# Altium PCB Apollo_Main_Board_1 8.PcbDoc (part 3 of 4)
Units mil, origin at the board's own origin, x right, y up, seen from the top; angles counter-clockwise.
Board outline 984.25 x 629.92 mil, 6 copper layers (Top, Inner Layer 2, Inner Layer 3, Inner Layer 4, Inner Layer 5, Bottom), stack 5.16 mil thick; 125 components, 112 nets, 514 pads, 2007 vias.
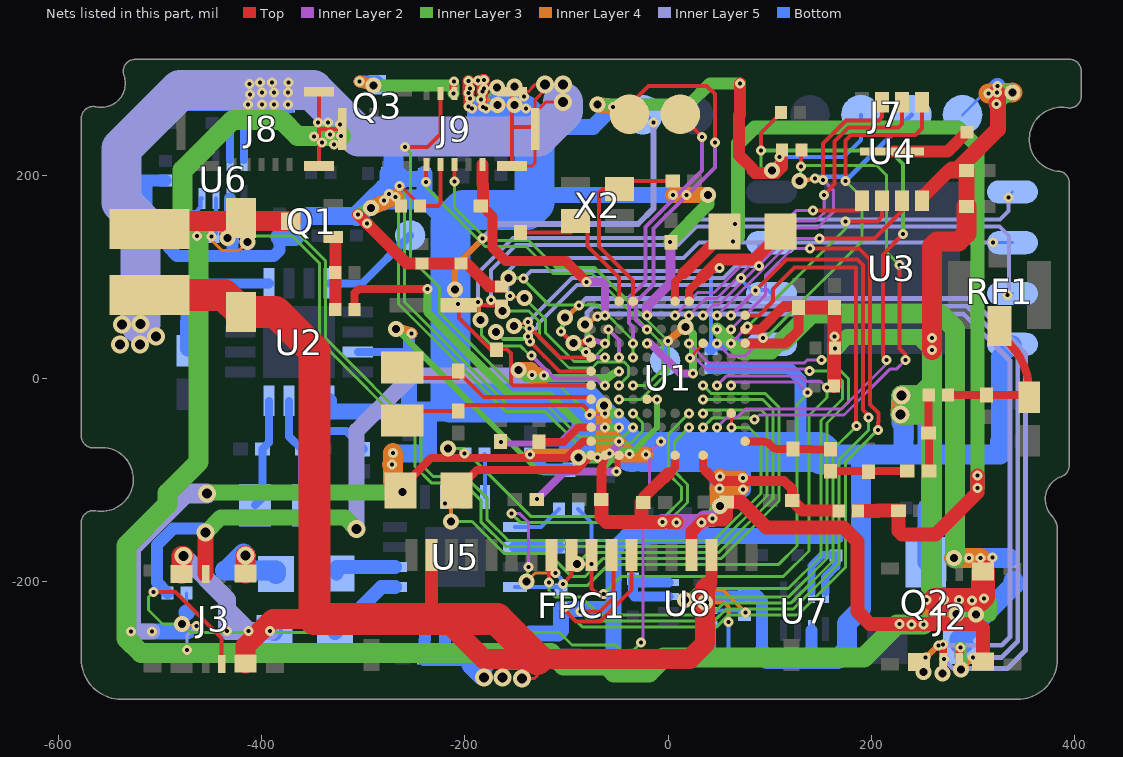
[diagram p7: the nets of this part, all layers, seen from the top]

## Via types
v1: diameter 9.84, hole 3.94, Inner Layer 4 to Bottom, 571 vias
v2: diameter 9.84, hole 3.94, Top to Inner Layer 2, 540 vias
v3: diameter 9.84, hole 3.94, Top to Inner Layer 3, 349 vias
v4: diameter 15.75, hole 7.87, Inner Layer 3 to Inner Layer 4, 268 vias
v5: diameter 9.84, hole 3.94, Inner Layer 5 to Bottom, 178 vias
v6: diameter 17.72, hole 9.84, Top to Bottom, 54 vias
v7: diameter 9.84, hole 3.94, Inner Layer 2 to Inner Layer 3, 25 vias
v8: diameter 9.84, hole 3.94, Inner Layer 4 to Inner Layer 5, 22 vias

## Nets (pads, with @x,y where several pads share a name; then routed paths per layer and width w, separated by ;. In a path a pad name is that pad's centre, name@x,y a point inside that pad or via, vN(x,y) a via of type N, cw(c..) or ccw(c..) an arc to the next point about the centre after c; other vN are vias at no path point) (continued)
I2C7_SDA: J3.4 R29.1 U1.F2 | length 885.7
  Top w3.94: v3(-506.55,-210.42) -484.7,-210.42 -439.52,-255.6 J3.4@-439.52,-281.2
  Inner Layer 2 w2.95: v7(-26.55,-260) -24.48,-257.93 -24.48,-116.21 -18.38,-110.11 -18.38,-73.5 v2(-6.89,-62.01)
  Inner Layer 3 w2.95: v3(-506.55,-210.42) -511.34,-215.21 -511.34,-228.16 -497.64,-241.86 v4(-478.35,-241.86) -469.94,-250.27 -106.83,-250.27 -94.57,-262.52 -51.56,-262.52 -44.74,-269.33 -35.88,-269.33 v7(-26.55,-260)
  Inner Layer 4 w2.95: v4(-478.35,-241.86) v8(-464.16,-243.74)
  Inner Layer 5 w2.95: v5(-473.4,-267.26) -473.4,-252.98 v8(-464.16,-243.74)
  Bottom w2.95: R29.1@-473.4,-268.36 v5(-473.4,-267.26)
I2S0_CLK: R14.1 U1.H4 | length 382.8
  Inner Layer 3 w2.95: v4(-216.76,-68.95) -202.12,-68.95 -135.21,-135.86 -2.86,-135.86 13.19,-119.81 13.19,-107.06 0.6,-94.47 0.6,-54.52 v3(20.67,-34.45)
  Inner Layer 4 w2.95: v4(-216.76,-68.95) -205.32,-68.95 v1(-200.18,-74.09)
  Bottom w2.95: v1(-200.18,-74.09) R14.1@-199.57,-74.7
I2S0_SD_MODE#: R13.1 U1.H3 U5.4 | length 445.8
  Top w2.95: U1.H3@19.74,-48.9 20.41,-48.23 v3(20.67,-48.23)
  Inner Layer 2 w2.95: v7(-154.05,-133.21) -145.94,-133.21 -137.63,-141.52 v7(-137.63,-185.61)
  Inner Layer 3 w2.95: v7(-154.05,-133.21) -145.49,-141.77 -0.42,-141.77 19.09,-122.26 19.09,-104.61 6.51,-92.02 6.51,-62.39 v3(20.67,-48.23) ; v4(-139.34,-200.04) v7(-137.63,-185.61)
  Inner Layer 4 w2.95: v4(-139.34,-200.04) -131.08,-191.78 v1(-110.75,-191.78)
  Bottom w3.94: U5.4@-150.58,-205.53 -108.03,-205.53 R13.1@-105.63,-207.93 -105.63,-196.9 v1(-110.75,-191.78)
I2S0_SDOUT: R11.2 U1.J5 | length 453.6
  Inner Layer 3 w2.95: v4(-89.72,-182.99) -78.05,-171.32 50.12,-171.32 103.22,-118.22 103.22,-31.03 92.86,-20.67 v3(34.45,-20.67)
  Inner Layer 4 w2.95: v4(-89.72,-182.99) v1(-75.43,-182.58)
  Bottom w3.94: R11.2@-88.46,-128.71 -75.43,-141.74 v1(-75.43,-182.58)
I2S0_WS: U1.J6 U5.14 | length 578.6
  Inner Layer 3 w2.95: v4(-213.8,-141.02) -192.9,-141.02 -161.41,-172.51 -117.6,-172.51 -94.81,-195.3 -81.85,-195.3 -63.78,-177.23 52.56,-177.23 109.12,-120.67 109.12,-28.58 95.3,-14.76 42.32,-14.76 v3(34.45,-6.89)
  Inner Layer 4 w3.94: v1(-219.43,-123.14) -213.8,-128.77 v4(-213.8,-141.02)
  Bottom w2.95: U5.14@-219.55,-116.89 -219.43,-117.01 v1(-219.43,-123.14)
ICM_INT1: J9.1 U1.D6 | length 380.6
  Top w2.95: U1.D6@-34.56,-7 v3(-34.45,-6.89)
  Top w3.94: v3(-238.37,193.02) -238.37,210.63 J9.1@-237.67,210.63
  Inner Layer 3 w2.95: v3(-238.37,193.02) -238.37,188.11 -180.03,129.77 -139.98,129.77 -113.37,103.16 -74.89,103.16 -5.41,33.69 -5.41,8.92 -21.23,-6.89 v3(-34.45,-6.89)
LCD_CS: FPC1.8 U1.L11 | length 825.6
  Top w3.94: v3(-86.4,-229.46) -67.02,-229.46 -53.97,-216.41 -53.97,-175.66 FPC1.8@-55.62,-174.01 ; v2(86.05,86.4) 116.52,116.87 186.45,116.87 191.88,111.44 191.88,-31.42 197.04,-36.58 v3(197.04,-38.63)
  Inner Layer 2 w3.94: v2(62.01,62.01) 74.03,74.03 74.03,74.38 v2(86.05,86.4)
  Inner Layer 3 w2.95: v3(-86.4,-229.46) -77.13,-238.73 45.51,-238.73 57.36,-226.88 123.51,-226.88 168.18,-182.22 168.18,-80.29 197.04,-51.43 v3(197.04,-38.63)
LCD_DC: FPC1.7 U1.L10 | length 937.1
  Top w3.94: v3(-102.03,-225.13) -102.03,-227.75 -90.47,-239.31 -67.13,-239.31 -35.93,-208.12 FPC1.7@-35.93,-174.01 ; v2(139.88,127.76) 184.46,127.76 ; 185.16,127.06 184.46,127.76 ; v3(206.46,-50.76) 206.46,-43.5 206.89,-43.07 206.89,-33.95 198.77,-25.83 198.77,117.08 188.09,127.76 184.46,127.76
  Inner Layer 2 w2.95: v2(62.01,48.23) 96.02,82.24 96.02,101.45 122.33,127.76 v2(139.88,127.76)
  Inner Layer 3 w2.95: v3(-102.03,-225.13) -96.63,-230.53 -96.63,-232.45 -84.44,-244.64 47.95,-244.64 59.81,-232.79 93.81,-232.79 127.81,-232.79 174.76,-185.84 174.76,-82.06 190.41,-66.41 190.81,-66.41 v3(206.46,-50.76)
LCD_LEDK: R17.1 U1.K10 | length 600.3
  Top w3.94: v3(48.23,48.23) U1.K10@48.31,48.31
  Inner Layer 3 w2.95: v4(281.39,-176.98) 282.03,-176.98 v4@282.35,-177.3
  Inner Layer 3 w12.99: v3(48.23,48.23) 71.4,25.06 102.09,25.06 114.12,37.09
  Inner Layer 3 w19.68: 114.12,37.09 140.89,63.86 267.24,63.86 282.35,48.75 v4@282.35,-177.3
  Inner Layer 4 w7.87: v1(307.38,-176.99) v1(319.44,-176.4)
  Inner Layer 4 w19.68: v4(281.39,-176.98) v1(307.38,-176.99)
  Bottom w2.95: v1(319.44,-176.4) 334.36,-176.4 334.87,-176.91 336.69,-176.91 R17.1@340.15,-180.37
  Bottom w19.68: v1(295.94,-176.66) 314.66,-176.66 v1@314.91,-176.91 ; v1(307.38,-176.99) 307.46,-176.91 v1@314.91,-176.91 ; R17.1@334.87,-176.91 v1@314.91,-176.91
LCD_RES: FPC1.11 U1.M11 | length 783.1
  Top w3.94: v3(-117.31,-200.78) -117.31,-174.01 FPC1.11@-114.67,-174.01 ; U1.M11@75.79,62.01 89.44,62.01 103.29,75.86 103.29,88.05 124.23,108.99 184.59,108.99 184.99,108.59 184.99,-43.93 185.38,-44.32 v3(185.38,-47.08)
  Inner Layer 3 w2.95: v3(-117.31,-200.78) -117.31,-208.89 -111.01,-215.19 -85.42,-215.19 -67.79,-232.82 43.06,-232.82 54.91,-220.97 121.07,-220.97 162.27,-179.77 162.27,-70.19 v3(185.38,-47.08)
LCD_TP_TINT: R57.2 U1.H9 U8.4 | length 624.3
  Inner Layer 2 w2.95: v2(20.67,34.45) 40.12,15 134.07,15 137.25,18.18 143.86,18.18 143.92,18.12 v7(151,18.12)
  Inner Layer 3 w2.95: v4(36.15,-220.51) 36.15,-219.26 40.35,-215.06 118.63,-215.06 156.37,-177.32 156.37,-44.01 177.51,-22.87 177.51,-0.35 159.04,18.12 v7(151,18.12)
  Inner Layer 4 w3.94: v4(36.15,-220.51) 55.09,-220.51 59.22,-224.64 v1(59.22,-239.67)
  Bottom w3.94: U8.4@38.16,-242.26 45.15,-242.26 45.15,-269.59 R57.2@53.14,-277.58 53.14,-277.52 59.22,-271.44 v1(59.22,-239.67)
LCD_TP_TRST: R56.2 U1.J9 U8.3 | length 627.5
  Top w2.95: v2(21.58,20.18) 21.23,20.53 34.8,34.1 U1.J9@34.45,34.45
  Inner Layer 2 w2.95: v2(21.58,20.18) 21.58,18.78 27.98,18.78 37.67,9.09 137.51,9.09 v7(139.33,7.27)
  Inner Layer 3 w2.95: v4(16.81,-218.03) 28.06,-206.78 118.56,-206.78 150.46,-174.88 150.46,-41.56 171.61,-20.42 171.61,-2.8 161.54,7.27 v7(139.33,7.27)
  Inner Layer 4 w3.94: v4(16.81,-218.03) 27.13,-207.71 53.38,-207.71 v1(76.2,-230.53)
  Bottom w2.95: R56.2@75.14,-232.8 75.14,-231.59 v1(76.2,-230.53)
  Bottom w3.94: U8.3@38.16,-228.48 70.82,-228.48 R56.2@75.14,-232.8
MSPI0_FLASH_CS#: R10.1 U1.D8 U3.1 | length 526.1
  Top w2.95: U1.D8@-34.87,20.67 v3(-34.45,20.67) U1.D8@-34.67,20.45
  Inner Layer 3 w2.95: v4(-157.28,98.86) -144.04,98.86 -117.44,72.26 -69.58,72.26 -34.45,37.13 v3(-34.45,20.67)
  Inner Layer 4 w2.95: v4(-157.28,98.86) -142.92,98.86 v8(-142.39,98.33)
  Inner Layer 5 w3.94: v8(-142.39,98.33) -135.16,105.56 47.37,105.56 v5(50.44,108.63)
  Bottom w3.94: R10.1@42.03,29.02 42.03,106.41 44.25,108.63 v5(50.44,108.63)
  Bottom w11.81: R10.1@42.03,29.02 46.45,33.43 U3.1@101.74,33.43
MSPI0_FLASH_SCLK: U1.C8 U3.6 | length 716.8
  Inner Layer 2 w3.94: v7(-58.56,48.02) -48.23,37.69 v2(-48.23,20.67)
  Inner Layer 3 w2.95: v4(-141.39,78.79) -120.89,58.29 -120.89,45.02 -92.48,16.61 -76.98,16.61 -58.56,35.03 v7(-58.56,48.02)
  Inner Layer 4 w2.95: v8(-155.53,81.17) v4(-141.39,78.79)
  Inner Layer 5 w3.94: v8(-155.53,81.17) -158.14,83.78 -158.14,104.85 -144.63,118.36 15.03,118.36 30.27,133.6 v5(319.81,133.6)
  Bottom w2.95: v5(319.81,133.6) 338.8,133.6 U3.6@338.96,133.43
MSPI0_FLASH_SIO0: U1.B6 U3.5 | length 780.4
  Top w3.94: v2(-62.01,-6.89) U1.B6@-61.81,-6.89
  Inner Layer 2 w3.94: v7(-134.3,22.48) -111.64,-0.18 -71.16,-0.18 -64.45,-6.89 v2(-62.01,-6.89)
  Inner Layer 3 w2.95: v4(-184.49,57.41) -184.49,59.5 -183.89,60.1 -183.89,42.63 -173.26,32 -145.47,32 -137.35,23.89 -134.3,23.89 v7(-134.3,22.48)
  Inner Layer 4 w2.95: v8(-187,75.23) -185.75,75.23 -185.75,57.41 v4(-184.49,57.41)
  Inner Layer 5 w3.94: v8(-187,75.23) -187,103.83 -152.78,138.05 6.88,138.05 25.08,156.25 326.67,156.25 335.22,164.8 v5(335.22,177.97)
  Bottom w2.95: v5(335.22,177.97) 335.22,179.69 U3.5@338.96,183.43
MSPI0_FLASH_SIO1: U1.A7 U3.2 | length 417.8
  Top w3.94: v3(-135.91,35.99) -121.42,21.5 -121.42,21.38 -106.93,6.89 U1.A7@-75.79,6.89
  Inner Layer 3 w2.95: v4(-169.52,45.66) -161.83,37.97 -137.89,37.97 v3(-135.91,35.99)
  Inner Layer 4 w2.95: v4(-169.52,45.66) -162.91,39.05 -139.99,39.05 v8(-138.07,40.97)
  Inner Layer 5 w3.94: v8(-138.07,40.97) -128.04,51 -128.04,53.33 -89.59,91.78 64.96,91.78 v5(71.79,98.61)
  Bottom w3.94: v5(71.79,98.61) 70.99,97.81 81.67,87.14 98.04,87.14 U3.2@101.74,83.43
MSPI0_FLASH_SIO2: U1.A8 U3.3 | length 388
  Top w3.94: v3(-136.27,48.89) v3@-135.58,49.58 ; v3@-135.54,49.58 -106.63,20.67 U1.A8@-75.79,20.67
  Inner Layer 3 w2.95: v4(-151.63,51.36) v3(-136.27,48.89)
  Inner Layer 4 w2.95: v4(-151.63,51.36) v8(-137.84,55.27)
  Inner Layer 5 w3.94: v8(-137.84,55.27) -94.44,98.67 54.48,98.67 66.42,110.61 v5(89.56,110.61)
  Bottom w3.94: v5(89.56,110.61) 89.56,133.43 U3.3@101.74,133.43
MSPI0_FLASH_SIO3: U1.C6 U3.7 | length 826
  Top w2.95: v3(-48.23,-6.89) v3(-48.23,-6.89)
  Top w3.94: U1.C6@-48.95,-6.89 v3(-48.23,-6.89)
  Inner Layer 3 w2.95: v4(-162.78,66.44) -137.41,66.44 -126.81,55.84 -126.81,39.59 -97.45,10.23 -74.97,10.23 -68.95,16.25 -43.52,16.25 -38.88,11.61 -38.88,2.46 v3(-48.23,-6.89)
  Inner Layer 4 w2.95: v8(-174.31,76.95) v4(-162.78,66.44)
  Inner Layer 5 w3.94: v8(-174.31,76.95) -174.31,106.78 -149.93,131.16 9.73,131.16 27.93,149.36 326.32,149.36 335.56,140.12 335.56,83.51 v5(333.81,81.76)
  Bottom w2.95: v5(333.81,81.76) 335.48,83.43 U3.7@338.96,83.43
MSPI2_PSRAM_CE#: U1.K9 U4.1 | length 412.5
  Top w2.95: v2(48.23,34.45) U1.K9@48.73,34.45
  Top w3.94: v2(48.23,34.45) U1.K9@48.46,34.45 ; v3(174.66,194.29) 174.66,234.03 179.96,239.33 243.51,239.33 250.03,245.85 U4.1@250.03,271.63 253.39,268.27 U4.1@253.39,267.89
  Inner Layer 2 w2.95: v2(48.23,34.45) 60.5,22.18 75.95,22.18 v7(93.21,39.44)
  Inner Layer 3 w2.95: v7(93.21,39.44) 95.72,39.44 118.3,62.02 118.3,62.3 191.07,135.07 191.07,177.88 v3(174.66,194.29)
MSPI2_PSRAM_SCLK: U1.L9 U4.6 | length 220.1
  Top w3.94: v3(174.82,154.54) 205.88,154.54 210.66,159.32 U4.6@210.66,174.78
  Inner Layer 2 w2.95: v2(62.01,34.45) 70.05,42.49 70.05,42.76 v7(78.09,50.8)
  Inner Layer 3 w2.95: v7(78.09,50.8) 174.82,147.53 v3(174.82,154.54)
MSPI2_PSRAM_SIO0: U1.G11 U4.5 | length 234.7
  Top w3.94: v2(6.89,62.01) U1.G11@7.1,62.01 ; v2(142.71,165.34) 187.81,165.34 189.06,166.59 189.06,172.86 U4.5@190.98,174.78
  Inner Layer 2 w2.95: v2(6.89,62.01) 29.45,84.57 45.73,84.57 126.5,165.34 v2(142.71,165.34)
MSPI2_PSRAM_SIO1: U1.H11 U4.2 | length 343.9
  Top w3.94: v2(20.67,62.01) U1.H11@20.71,62.05 ; v2(153.23,180.26) 163.98,191.01 163.98,233.09 177.71,246.82 226.63,246.82 230.35,250.54 U4.2@230.35,271.63
  Inner Layer 2 w2.95: v2(20.67,62.01) 37.32,78.66 48.18,78.66 124.53,155.01 145.6,155.01 153.23,162.64 v2(153.23,180.26)
MSPI2_PSRAM_SIO2: U1.J11 U4.3 | length 331.6
  Top w3.94: v2(34.45,62.01) U1.J11@34.68,62.24 ; v2(152.34,195.35) 152.34,231.2 174.86,253.72 207.38,253.72 210.66,257 U4.3@210.66,271.63 211.37,270.92 U4.3@211.37,266.32
  Inner Layer 2 w2.95: v2(34.45,62.01) 44.5,72.06 49.93,72.06 126,148.13 147.08,148.13 162.59,163.64 162.59,185.1 v2(152.34,195.35)
MSPI2_PSRAM_SIO3: U1.K11 U4.7 | length 235.3
  Top w3.94: v2(48.23,62.01) U1.K11@48.68,62.46 ; v2(148.84,137.62) 203.18,137.62 230.35,164.79 U4.7@230.35,174.78
  Inner Layer 2 w2.95: v2(48.23,62.01) 123.84,137.62 v2(148.84,137.62)
NETC7_2: C7.2 U1.A3 | length 57.1
  Top w7.87: C7.2@-126.95,-62.48 -102.24,-62.48 -87.99,-48.23 U1.A3@-75.79,-48.23
NETC8_2: C8.2 U1.B3 | length 110.2
  Top w3.94: C8.2@-164.76,-62.19 C8.2@-164.42,-62.53
  Inner Layer 2 w5.91: v2(-164.42,-62.58) -162.88,-64.12 -107.73,-64.12 -91.84,-48.23 v2(-62.01,-48.23)
NETC10_2: C10.2 U1.C1 | length 108.6
  Top w3.94: C10.2@-129.31,-119.44 v2(-128.9,-118.99)
  Top w5.91: v2(-50.99,-91.88) -49.61,-91.88 -49.61,-75.79 U1.C1@-48.23,-75.79
  Inner Layer 2 w7.87: v2(-128.9,-118.99) -101.79,-91.88 v2(-50.99,-91.88)
NETC13_1: C13.1 R1.1 U1.J1 | length 170.6
  Top w7.87: U1.J1@34.45,-75.79 34.45,-88.76 36.98,-91.29
  Top w9.84: 36.98,-91.29 46.69,-101 114.07,-101 121.17,-108.1 ; 121.21,-108.1 122.11,-109 C13.1@122.11,-120.3
  Top w11.81: C13.1@122.11,-120.3 131.83,-130.03 167.93,-130.03 R1.1@167.93,-130.44
NETC14_1: C14.1 L2.2 R1.2 U1.G12 | length 972.2
  Top w2.95: v3(63.97,134.86) 63.97,135.59 L2.2@55.27,144.28 63.05,152.06 v3(65.71,152.06)
  Top w7.87: U1.G12@6.89,75.79 6.89,95 15.36,103.47
  Top w11.81: 15.36,103.47 55.27,143.38 L2.2@55.27,144.28
  Top w13.78: R1.2@186.95,-130.44 206.18,-130.44 206.26,-130.36 C14.1@226.77,-130.36 226.77,-150.22 230.14,-153.59 263.13,-153.59 304.39,-112.33 v3@304.39,-108.37 ; v3(304.39,-95.89) v3@304.39,-108.37 ; v3(304.75,-108.01) v3@304.39,-108.37
  Inner Layer 3 w13.78: v3(63.97,134.86) 68.76,139.65 68.76,230.87 84.89,247 285.23,247 304.75,227.48 v3(304.75,-108.01)
NETC15_1: C15.1 U1.A5 X1.1 | length 209
  Top w3.94: X1.1@-261.67,10.47 -251.27,0.07 -206.55,0.07 C15.1@-206.55,7.16 -206.55,6.28 -181.94,-18.33 -81.03,-18.33 -75.71,-20.48 U1.A5@-75.79,-20.67
NETC16_1: C16.1 U1.A4 X1.2 | length 195.5
  Top w3.94: X1.2@-261.67,-41.49 -252.45,-32.28 C16.1@-206.55,-32.28 -200.67,-26.4 -83.84,-26.4 U1.A4@-75.79,-34.45
NETC17_2: C17.2 U1.D12 X2.3 | length 201.9
  Top w3.94: U1.D12@-34.45,75.79 -34.45,96.41 -67.98,129.94 -67.98,183.01 -64.72,186.27 X2.3@-47.71,186.27 -47.71,192.6 -45.98,194.32 C17.2@4.45,194.32
NETC18_1: C18.1 U1.C12 X2.1 | length 166.2
  Top w3.94: C18.1@-145.14,143.57 -95.64,143.57 -91.02,148.2 X2.1@-91.02,154.78 -79.3,154.78 -79.3,130.12 -48.23,99.05 U1.C12@-48.23,75.79
NETC19_1: C19.1 L3.2 U1.M2 | length 86.4
  Top w7.87: U1.M2@75.79,-62.01 92.77,-62.01 cw(c92.77,-71.95) 99.8,-64.92 101.83,-66.95 ccw(c108.44,-60.35) 108.44,-69.69 C19.1@122.75,-69.69 141.15,-69.69 141.35,-69.88 L3.2@159.75,-69.88
NETC20_1: C20.1 L3.1 L4.2 | length 76.3
  Top w7.87: L3.1@159.75,-91.48 197.15,-91.48 C20.1@197.15,-91.87 197.91,-91.11 L4.2@235.34,-91.11
NETC43_1: C43.1 L4.1 R44.2 | length 75.1
  Top w3.94: C43.1@256.36,-53.87 256.36,-53.7 C43.1@256.49,-53.58
  Top w7.87: R44.2@256.49,-16.49 256.49,-53.58 256.93,-54.02 L4.1@256.93,-91.11
NETC44_1: C44.1 D3.2 R44.1 RF1.1 | length 160.4
  Top w7.87: R44.1@275.51,-16.49 294.07,-16.49 294.2,-16.36 C44.1@313.18,-16.36 353.1,-16.36 D3.2@355.4,-18.67 355.4,-12.98 ccw(c288.4,-12.98) 335.78,34.4 326.36,43.81 RF1.1@326.36,51.69
NETC45_1: C45.1 R45.2 | length 48.2
  Bottom w11.81: R45.2@-474.17,74.49 -474.17,56.13 -474.69,55.62 -474.69,28.71 C45.1@-473.1,27.11
NETC46_1: C46.1 U2.14 | length 87.7
  Bottom w7.87: U2.14@-353.32,-22.22 -353.32,-45.63 -347.24,-51.71 -316.94,-51.71 -299.6,-69.04 C46.1@-299.6,-69.92
NETC50_1: C50.1 U2.16 X3.2 | length 108.4
  Bottom w7.87: X3.2@-406.51,-124.85 -399.26,-117.6 C50.1@-399.26,-69.61 -392.69,-63.04 U2.16@-392.69,-22.22
NETC51_1: C51.1 U2.15 X3.1 | length 110.8
  Bottom w7.87: U2.15@-373.01,-22.22 -373.01,-57.44 -361.04,-69.4 C51.1@-360.17,-69.4 -360.17,-119.24 X3.1@-354.55,-124.85
NETD2_2: D2.2 J1.2 Q1.3 | length 194.8
  Top w3.94: D2.2@-420.68,154.73 -420.68,157.45 D2.2@-420.41,157.72
  Top w19.68: J1.2@-510.64,147.02 -502.92,154.73 Q1.3@-371.39,154.73 D2.2@-420.68,154.73
NETL1_1: L1.1 U1.A1 | length 146.9
  Top w7.87: L1.1@-208.36,-110.34 -188.14,-90.12 -107.66,-90.12 ; -107.65,-90.13 -90.13,-90.13 U1.A1@-75.79,-75.79
NETL1_2: L1.2 U1.A2 | length 208.9
  Top w7.87: L1.2@-263.47,-110.34 -263.47,-108.38 -233.41,-78.31 -100.01,-78.31 -83.71,-62.01 U1.A2@-75.79,-62.01
NETL2_1: L2.1 U1.H12 | length 125.5
  Top w7.87: U1.H12@20.67,75.79 20.67,86.51 33.44,99.27
  Top w11.81: 33.44,99.27 50.88,116.72 84.79,116.72 110.38,142.32 L2.1@110.38,144.28
NETL5_1: L5.1 U5.9 | length 77.7
  Bottom w13.78: L5.1@-327.63,-250.8 -282.3,-205.47 U5.9@-268.68,-205.47
NETL6_1: L6.1 U5.10 | length 64.4
  Bottom w13.78: L6.1@-326.5,-192.37 -326.5,-185.78 U5.10@-268.68,-185.78
NETQ1_1: Q1.1 R8.1 R9.1 | length 75
  Top w3.94: R9.1@-327.57,101.71 R9.1@-327.57,104.32
  Top w11.81: Q1.1@-329.7,138.98 -327.56,136.84 -327.56,101.71 R8.1@-327.56,67.52
NETQ2_1: Q2.1 R17.2 | length 88.3
  Bottom w19.68: Q2.1@290.73,-261.08 286.65,-261.08 286.65,-257.01 340.69,-202.97 340.15,-201.66 R17.2@340.15,-199.39
NETQ2_3: Q2.3 R18.1 | length 53.6
  Bottom w15.75: R18.1@253.43,-127.82 253.43,-181.08 Q2.3@253.73,-181.08
NETR2_2: R2.2 U1.D4 | length 452.1
  Top w2.95: v3(-274.58,181.54) -263.07,170.06 R2.2@-263.07,169.64
  Inner Layer 3 w2.95: v3(-274.58,181.54) -265.44,172.4 -265.44,73.02 -159.61,-32.8 -120.92,-32.8 -90.23,-63.49 -36.49,-63.49 -25.1,-52.1 -25.1,-43.8 v3(-34.45,-34.45)
NETR11_1: R11.1 U5.1 | length 50.5
  Bottom w3.94: U5.1@-150.58,-146.47 -125.23,-146.47 R11.1@-107.48,-128.71
NETR12_1: R12.1 U5.2 | length 43.1
  Bottom w11.81: U5.2@-150.58,-166.16 -126.14,-166.16 -126.07,-166.23 R12.1@-107.47,-166.23
NETR14_2: R14.2 U5.16 | length 42.3
  Bottom w3.94: R14.2@-180.55,-74.7 -180.18,-75.07 U5.16@-180.18,-116.89
NETR26_2: R26.2 U4.9 | length 81.4
  Top w11.81: U4.9@220.51,223.2 275.09,223.2 R26.2@294.04,242.16
NETR45_1: R45.1 U2.5 | length 81.5
  Bottom w9.84: R45.1@-474.17,93.51 -432.91,93.51 U2.5@-392.69,93.52
NETR47_1: R47.1 U6.7 U6.8 | length 92.3
  Bottom w7.87: U6.7@-431.05,214.65 -431.05,246.57 -425.79,251.83 -424.35,251.83 -423.6,251.08 R47.1@-411.84,251.08 -417.27,245.65 U6.8@-417.27,214.64
NETR58_1: R58.1 U7.7 U7.8 | length 95.2
  Bottom w7.87: U7.7@140.98,-210.55 140.98,-184.76 151.6,-174.14 165.25,-174.14 R58.1@165.25,-174.29
  Bottom w8.66: U7.8@154.76,-210.56 154.76,-195.8 165.25,-185.31 R58.1@165.25,-174.29
NETR59_1: R59.1 U8.7 U8.8 | length 89.9
  Bottom w9.84: U8.7@0.36,-214.7 -32.91,-214.7 -34.67,-212.94 -34.67,-210.77 -34.39,-210.49 R59.1@-34.39,-197.3 -34.39,-200.92 U8.8@0.37,-200.92
NETTP1_1: TP1.1 U1.E9 | length 150.1
  Top w2.95: U1.E9@-20.93,34.19 v2(-20.67,34.45)
  Inner Layer 2 w7.87: v2(-20.67,34.45) -19.2,35.91 12.08,4.63 v7(24.36,4.63)
  Inner Layer 3 w7.87: v4(17.2,50.65) 24.36,43.49 v7(24.36,4.63)
  Inner Layer 4 w7.87: v1(-0.12,36.89) v4(17.2,50.65)
  Bottom w4.72: TP1.1@-3.04,17.08 v1(-0.12,36.89)
NETTP2_1: TP2.1 U2.8 | length 99.2
  Bottom w7.87: U2.8@-333.64,93.52 -301.08,93.52 TP2.1@-253.95,140.65
NRST: C21.1 D1.1 J5.1 R3.1 U1.A6 | length 591.3
  Top w2.95: v3(-207.02,73.15) D1.1@-205.82,71.96
  Top w3.94: C21.1@-164.95,28.01 C21.1@-168.93,28.01 ; R3.1@-164.04,71.5 -178.74,71.5 -179.2,71.96 D1.1@-205.82,71.96 -205.82,59.3 -174.53,28.01 C21.1@-168.93,28.01 ; U1.A6@-75.79,-6.89 -152.8,-6.89 -154.48,-5.21 -154.48,24.29 -159.22,29.03 -168.93,29.03 C21.1@-168.93,28.01
  Inner Layer 3 w3.94: v4(-209.7,87.32) v3(-207.02,73.15)
  Inner Layer 4 w5.91: v4(-209.7,87.32) -209.7,110.25 v8(-182.44,137.51)
  Inner Layer 5 w5.91: v8(-182.44,137.51) -168.11,151.84 -29.64,151.84 -14.28,167.2 v5(-14.28,251.94)
  Bottom w2.95: J5.1@-24.93,259.26 -21.6,259.26 v5(-14.28,251.94)
PDM0_MIC_CLK: J2.3 U1.A9 | length 975.8
  Top w4.72: v3(-105.5,46.14) -93.81,34.45 U1.A9@-75.79,34.45
  Top w7.87: J2.3@270.74,-279.12 v3(270.74,-262.23)
  Inner Layer 3 w4.72: v3(-105.5,46.14) v4(-101.29,59.89)
  Inner Layer 3 w7.87: v4(270.1,-290.77) 270.42,-290.77 270.42,-262.23 v3(270.74,-262.23)
  Inner Layer 4 w4.72: v4(-101.29,59.89) v8(-87.58,71.52)
  Inner Layer 4 w5.91: v4(270.1,-290.77) v8(271.5,-276.46)
  Inner Layer 5 w4.72: v8(-87.58,71.52) -80.52,78.58 297.6,78.58 351.76,24.42 351.76,-267.81 333.84,-285.73 280.77,-285.73 v8(271.5,-276.46)
PDM0_MIC_LR: J2.4 U1.B8 | length 909.3
  Top w2.95: J2.4@286.48,-279.2 J2.4@286.48,-273.58
  Top w7.87: J2.4@286.48,-273.58 v3(287.57,-264.98)
  Inner Layer 2 w4.72: v7(-80.84,25.97) -75.54,20.67 v2(-62.01,20.67)
  Inner Layer 3 w5.91: v4(-93.03,34.56) -93.25,34.56 v7(-80.84,25.97)
  Inner Layer 3 w11.81: v3(287.57,-264.98) v4(288.44,-286.56)
  Inner Layer 4 w4.72: v4(-93.03,34.56) v8(-78.94,37.19)
  Inner Layer 4 w5.91: v4(288.44,-286.56) v8(299.86,-274.7)
  Inner Layer 5 w4.72: -79.76,51.36 -79.76,37.19 v8(-78.94,37.19) ; -79.74,51.38 -79.74,64.9 -73.74,70.9 294.34,70.9 344.04,21.2 344.04,-259.03 328.37,-274.7 v8(299.86,-274.7)
PDM0_MIC_SDOUT: J2.7 U1.B9 | length 875.4
  Top w2.95: J2.7@247.11,-279.12 247.11,-275.05 v3(253.43,-275.05)
  Inner Layer 2 w5.91: v7(-77.03,38.26) v2(-62.01,34.45)
  Inner Layer 3 w4.72: v4(-81.56,52.94) -82.69,51.81 -82.69,51.4 v7(-77.03,38.26)
  Inner Layer 3 w7.87: v4(251.3,-289.3) v3(253.43,-275.05)
  Inner Layer 4 w4.72: v4(-81.56,52.94) v8(-69.5,60.66)
  Inner Layer 4 w5.91: v4(251.3,-289.3) 251.3,-277.56 v8(266.01,-262.85)
  Inner Layer 5 w4.72: v8(-69.5,60.66) -66.97,63.19 290.89,63.19 336.36,17.72 336.36,-254.7 328.21,-262.85 v8(266.01,-262.85)
PMIC_INT: J9.9 U1.B4 | length 464.4
  Top w3.94: v3(-259.15,227.55) -236.96,227.55 -223.89,240.62 J9.9@-223.89,280.46
  Inner Layer 2 w2.95: v7(-77.44,-36.37) -77.44,-35.41 -62.01,-35.41 v2(-62.01,-34.45)
  Inner Layer 3 w2.95: v3(-259.15,227.55) -253.63,222.03 -253.63,118.04 -224.86,89.27 -224.86,64.46 -152.4,-8 -105.81,-8 v7(-77.44,-36.37)
PWM_MOTOR: R8.2 U1.C3 | length 349.9
  Top w2.95: U1.C3@-48.91,-48.8 -48.34,-48.23 v3(-48.23,-48.23) U1.C3@-47.87,-47.87
  Top w7.87: R8.2@-308.54,67.52 -308.54,83.9 -304.38,88.06 v3(-237.06,88.06)
  Inner Layer 3 w7.87: v3(-237.06,88.06) -237.06,64.83 -155.2,-17.03 -116.27,-17.03 -85.07,-48.23 v3(-48.23,-48.23)
RTC_NIRQ: R46.1 U1.E5 U2.11 | length 459.6
  Top w4.72: U1.E5@-20.67,-20.67 v3(-10.95,-20.67)
  Inner Layer 3 w5.91: v4(-267.63,48.76) -127.1,-91.77 -66.63,-91.77 -45.74,-70.88 -33.44,-70.88 -10.95,-48.39 v3(-10.95,-20.67)
  Inner Layer 4 w11.81: v4(-267.63,48.76) v1(-252.49,44.2)
  Bottom w7.87: U2.11@-305.29,25.81 -254.8,25.81 R46.1@-254.8,23.97
  Bottom w11.81: R46.1@-254.8,23.97 -254.8,41.89 v1(-252.49,44.2)
SPI6_MOSI: FPC1.10 U1.L6 | length 518.4
  Top w3.94: v3(-103.59,-202.42) -94.99,-193.82 FPC1.10@-94.99,-174.01
  Inner Layer 2 w2.95: v2(62.01,-6.89) 62.01,-3.44 126.83,-3.44 v7(137.21,-13.82)
  Inner Layer 3 w2.95: v3(-103.59,-202.42) -101.92,-204.09 -79.5,-204.09 -58.55,-183.14 108.79,-183.14 126.84,-165.09 126.84,-25.6 137.91,-14.52 v7(137.21,-13.82)
SPI6_SCK: FPC1.9 U1.K6 | length 551.5
  Top w3.94: FPC1.9@-75.3,-174.01 -75.3,-206.69 -69.66,-212.33 v3(-63.81,-212.33)
  Inner Layer 2 w2.95: v2(48.23,-6.89) 57.59,2.47 130.09,2.47 135.84,-3.28 150.51,-3.28 v7(156.35,-9.12)
  Inner Layer 3 w2.95: v3(-63.81,-212.33) -46.44,-194.96 113.68,-194.96 138.65,-169.98 138.65,-36.67 156.35,-18.97 v7(156.35,-9.12)
SPK+: C31.2 J3.5 L5.2 | length 241
  Top w19.68: J3.5@-478.89,-192.46 -478.72,-192.46 -478.72,-174.67 v6(-477.06,-174.67)
  Inner Layer 5 w17.72: v6(-477.06,-174.67) -434.05,-217.68 -434.05,-227.32 ; v5(-412.77,-248.96) -412.77,-248.6 -434.05,-227.32 ; v5(-391.69,-248.66) v5(-434.05,-248.66) -434.05,-227.32
  Bottom w2.95: C31.2@-435.4,-248.96 -435.1,-248.66 v5(-434.05,-248.66) ; v5(-391.69,-248.66) -389.41,-248.66 L5.2@-387.26,-250.81
  Bottom w15.75: C31.2@-435.4,-248.96 v5(-412.77,-248.96) -387.26,-248.96 L5.2@-387.26,-250.81
SPK-: C30.2 J3.6 L6.2 | length 99
  Top w19.68: J3.6@-415.89,-192.25 v6(-415.9,-174.49)
  Bottom w19.68: v6(-415.9,-174.49) -418.04,-172.35 -434.85,-189.16 -434.85,-188.97 C30.2@-435.92,-188.97 -386.13,-188.97 L6.2@-386.13,-192.38
SW1_VDD1V8: C35.1 FPC1.4 J2.8 J8.13 J8.14 J8.16 | length 2059.6
  Top w2.95: v3(-321.8,238.58) -321.8,244.37 J8.16@-320.78,245.39
  Top w3.94: J8.13@-343.61,208.96 -343.61,245.39 ; J8.14@-343.61,282.14 -343.61,245.39 ; J8.16@-320.78,245.39 -343.61,245.39
  Top w11.81: FPC1.4@23.12,-174.01 23.12,-150.74 33.69,-140.17 54.29,-140.17 57.79,-136.67 C35.1@57.79,-121.58 C35.1@58.66,-121.58
  Top w13.78: C35.1@57.79,-121.58 71.9,-121.58 97.05,-146.73 172.51,-146.73 186.39,-160.61 186.39,-229.31 198.85,-241.77 v3@227.62,-241.77 ; v3(227.51,-241.88) v3@227.62,-241.77 ; v3(239.68,-242.47) v3@240.38,-241.77 ; v3(251.46,-242.27) v3@251.96,-241.77 ; J2.8@310.11,-278.8 310.11,-245.94 304.04,-241.77 v3@251.96,-241.77 ; v3@227.62,-241.77 v3@240.38,-241.77 ; v3@240.38,-241.77 v3@251.96,-241.77
  Inner Layer 3 w19.68: v3(-321.8,238.58) -364.69,238.58 -380.57,254.46 -428.26,254.46 -477.85,204.87 -477.85,160.75 -461.99,144.89 -461.99,-82.31 -492.66,-112.98 -492.66,-124.11 -533.27,-164.72 -533.27,-255.91 -518.72,-270.46 -115.18,-270.46 -102.91,-282.71 -59.92,-282.71 ; -59.91,-282.7 -53.09,-289.52 -18.98,-289.52 -4.45,-274.99 192.6,-274.99 225.32,-242.27 v3(251.46,-242.27)
  other v3: -328.74,230.31 -340.55,232.28 -348.43,238.19 -332.68,240.16 -322.83,250 -344.49,251.97 -334.65,251.97
SW2_VDD1V9: C1.2 C2.2 C3.2 C4.2 C6.2 C11.2 C12.1 C26.1 C27.1 C41.1 C42.1 C47.2 C49.1 J2.6 J7.4 J9.6 J9.7 Q3.1 R3.2 R5.1 R7.1 R10.2 R20.2 R21.2 R22.2 R23.2 R24.2 R25.2 R27.1 R28.2 R29.2 R30.2 R31.2 R46.2 R54.1 R55.1 R56.1 R57.1 R61.1 U1.B1 U1.C4 U1.E11 U1.G1 U1.M9 U1.M10 U2.13 U3.8 U4.8 U6.2 U7.2 U8.2 | length 7185
  Top w2.95: J9.7@-196.33,280.46 v3(-196.33,280.95) ; v3(-48.23,-34.45) U1.C4@-47.81,-34.87 ; v2(-5.57,-141.56) 1.23,-141.56 1.6,-141.93 v2(8.4,-141.93) ; v3(1.92,133.92) 2.73,133.92 C1.2@2.86,133.79 ; R21.2@164.13,29.64 v3(164.45,29.25) v3(164.45,29.25) ; v3(254.27,-218.01) 262.83,-218.01 263,-217.84 v3(271.57,-217.84) 271.57,-217.92 286.26,-217.92 v3(286.26,-218.01) v3@286.26,-218.29 ; J9.6@-182.55,280.46 v3(-182.55,282.25) J9.6@-182.55,280.46
  Top w3.94: R31.2@-203.68,113.1 -198.81,113.1 R31.2@-198.81,113.18 ; v2(-20.67,62.01) U1.E11@-20.59,62.09 ; C1.2@2.45,131.01 2.45,133.38 C1.2@2.86,133.79 ; R21.2@163.12,30.2 163.57,30.2 R21.2@164.13,29.64
  Top w7.87: -65.76,-89.06 U1.B1@-62.01,-75.79 ; 0.93,-93.66 6.89,-87.7 U1.G1@6.89,-75.79
  Top w9.06: J9.6@-182.55,280.46 -182.55,267.09 v3(-182.06,267.09)
  Top w9.84: v3(-196.33,267.3) J9.7@-196.33,280.46 ; C3.2@-65.76,-119.51 -65.76,-89.06 ; U1.M9@75.79,34.45 115.77,34.45 128.44,47.12 C4.2@128.44,69.63 128.44,71.08 114.15,71.08 91.3,48.23 U1.M10@75.79,48.23
  Top w11.81: v3(-305.42,161.31) -257.2,113.1 R30.2@-242.15,113.1 -227.12,113.1 -227.04,113.18 -198.81,113.18 -176.15,90.52 R3.2@-164.04,90.52 ; v3(-196.53,292.53) -196.33,292.53 J9.7@-196.33,280.46 ; J9.6@-182.55,280.46 -182.55,293.62 v3(-181.06,293.62) ; C2.2@-24.43,-122.16 -24.43,-117.6 -0.49,-93.66 0.93,-93.66 -2.88,-97.47 ; v3(70.55,290.1) 70.55,259.06 69.97,258.48 69.97,219.34 83.24,206.07 83.24,204.31 85.32,202.23 106.21,202.23 112.13,208.15 R61.1@112.13,224.63
  Top w13.78: C3.2@-65.76,-119.51 -65.76,-136.64 -60.84,-141.56 -26.05,-141.56 ; C2.2@-24.43,-122.16 -26.05,-122.16 -26.05,-141.56 ; v2(-5.57,-141.56) -26.05,-141.56 ; 1.23,-141.56 8.03,-141.56 v2(8.4,-141.93) ; C4.2@128.44,69.63 C6.2@163.88,69.63 v3@163.88,43.17 ; R20.2@163.12,-7.61 R21.2@163.12,30.2 ; v3(163.75,41.24) 163.75,43.04 v3@163.88,43.17 ; v3(164.45,29.25) R21.2@163.12,30.2 ; U4.8@250.03,174.78 250.03,178.12 276.49,204.58 278.45,204.58 ; R21.2@163.12,30.2 163.88,30.95 v3@163.88,43.17
  Top w15.75: C27.1@293.58,169.15 C26.1@293.58,204.58 278.45,204.58 279.57,205.7 285.24,205.7 324.47,244.93 v3@324.47,272.46 ; v3(323,270.02) 323,270.99 v3@324.47,272.46 ; v3(323.61,281.41) 324.47,280.55 v3@324.47,272.46
  Top w19.68: v3(259.64,28.02) 259.64,42.5 259.64,129.9 264.56,134.82 285.86,134.82 293.58,142.54 C27.1@293.58,169.15 ; v3(259.65,39.44) v3@259.65,42.49
  Top w23.62: 262.83,-218.01 v3(286.26,-218.01) ; v3@286.26,-218.29 306.38,-218.29 310.11,-214.56 J2.6@310.11,-190.25
  Inner Layer 2 w9.84: v2(-20.67,62.01) -20.67,70.72 2.45,93.84 2.45,133.39 v3(1.92,133.92)
  Inner Layer 2 w15.75: v2(-5.57,-141.56) v7@32.09,-141.56 ; v7(32.67,-142.14) v7@32.09,-141.56 ; v7(43.66,-138.11) 35.54,-138.11 v7@32.09,-141.56
  Inner Layer 3 w2.95: v3(-196.33,267.3) -184.37,267.3 -182.68,268.99 v4(-167.77,268.99) ; v3(-196.33,280.95) -191.23,275.85 -178.92,275.85 v4(-168.41,286.36) ; v4(-151.43,268.88) v4(-151.41,287.1) ; v3(254.27,-218.01) 262.65,-218.01 262.84,-218.01 263.01,-217.84
  Inner Layer 3 w9.84: v4(-62.87,-26.75) -55.17,-34.45 v3(-48.23,-34.45)
  Inner Layer 3 w11.81: v3(-296.25,152.14) v3(-305.42,161.31) v4(-292.42,167.71) ; v4(-69.6,269.34) 20.42,269.34 41.18,290.1 v3(70.55,290.1) ; v3(163.75,41.24) v3(164.45,29.25) ; v3(323.61,281.41) v3(323,270.02) v4(338.8,281.16)
  Inner Layer 3 w12.99: v3(1.92,133.92) 39.1,171.1 v4(39.1,180.51)
  Inner Layer 3 w15.75: v6(-453.96,-113.25) -453.96,-112.33 -261.75,-112.33 v4(-261.5,-112.08) ; v7@33.89,-141.55 37.34,-138.11 v7(43.66,-138.11) v4(51.27,-125.53) ; v3(164.45,29.25) 176.06,40.86 246.8,40.86 ; v3(259.64,28.02) 246.8,40.86 ; v3@259.64,38.53 257.31,40.86 246.8,40.86 ; v4(283.73,-232.1) v4@303.27,-232.1 ; v4(303.08,-232.4) 303.08,-232.29 v4@303.27,-232.1 ; v3(311.02,-216.54) 315.88,-221.39 315.88,-232.1 v4@303.27,-232.1 ; v3(323.61,281.41) v4(338.8,281.16)
  Inner Layer 3 w19.68: v6(228.52,-35.58) 244.47,-35.58 259.65,-20.4 ; v6(229.67,-16.88) 248.12,-16.88 259.65,-5.35 ; v3(259.64,28.02) v3@259.64,38.53 ; v3(259.65,39.44) 259.65,-5.35 ; 262.84,-218.01 v3(286.26,-218.01) ; v3(271.57,-217.84) 263.01,-217.84 262.82,-217.84 262.65,-218.01 259.65,-215.01 259.65,-20.4 ; 259.65,-20.4 259.65,-5.35
  Inner Layer 4 w2.95: v1(-183.95,274.36) -175.62,274.36 v4(-167.77,268.99) v4(-151.43,268.88)
  Inner Layer 4 w11.81: v1(50.8,-108.4) 52.04,-109.64 v1(73.95,-109.64) 73.95,-98.26 v1(73.49,-98.26) 72.1,-96.87 v1(51.32,-96.87)
  Inner Layer 4 w15.75: v4(-292.42,167.71) v1(-268.47,178.34) ; v4(-69.6,269.34) v1(-54.38,267.03) ; v4(-62.87,-26.75) -62.87,-52.56 ; v1(-37.8,-74.45) v1@-37.8,-75.25 ; v1(-21.71,-75.25) v1@-37.8,-75.25 ; v1(4.62,180.51) v1(18.12,180.51) v4(39.1,180.51) ; v1(50.8,-108.4) v1(51.32,-96.87) ; -62.87,-52.56 -60.49,-52.56 v1@-37.8,-75.25 ; -62.87,-52.56 -62.87,-71.66 -59.28,-75.25 v1@-37.8,-75.25
  Inner Layer 4 w19.68: v1(-271.78,-85.03) v1@-270.73,-86.08 ; v1(-270.73,-73.58) v1@-270.73,-86.08 ; v4(-261.5,-112.08) -260.29,-112.08 -270.73,-101.64 v1@-270.73,-86.08 ; v1(50.8,-108.4) v4(51.27,-125.53) ; v4(303.08,-232.4) 263.89,-232.4 258.75,-227.26 258.75,-26.7 ; v1(315.57,280.3) v4(338.8,281.16) ; 258.75,-26.7 248.93,-16.88 v6(229.67,-16.88) v6(228.52,-35.58) 249.86,-35.59 258.75,-26.7
  Inner Layer 5 w15.75: v5(-528.82,-249.34) v5(-507.89,-249.3)
  Inner Layer 5 w19.68: v5(-528.82,-249.34) -528.82,-166.77 -475.3,-113.25 v6(-453.96,-113.25)
  Bottom w2.95: R28.2@-508.83,-249.34 R28.2@-508.83,-249.34 v5(-507.89,-249.3) ; R27.1@-473.84,-211.26 -473.84,-230.28 -473.4,-230.72 R29.2@-473.4,-249.34 ; R25.2@-344.64,159.32 -344.29,159.67 R25.2@-343.5,159.67 ; v1(-183.95,274.36) -178.07,268.48 -178.07,259.93 ; v1@-41.36,-74.07 -39.38,-74.07 -37.46,-75.99 -37.46,-74.79 v1(-37.8,-74.45) -35.66,-72.61 -24.35,-72.61 v1(-21.71,-75.25) ; 80.3,-277.23 85.67,-271.86 92.52,-271.86 ; 140.98,-274.66 142.75,-276.44 ; J7.4@289.75,259.26 310.93,280.43 v1@315.7,280.43 ; C11.2@-58.7,-74.07 -58.4,-74.37 -58.4,-74.96 v1(-57.49,-74.05) ; C11.2@-58.7,-74.07 -57.96,-74.81 -57.96,-74.52 v1(-57.49,-74.05) ; C11.2@-58.7,-74.07 v1(-57.49,-74.05)
  Bottom w3.94: -246.12,196.19 -240.71,201.6 -239.62,201.6 R7.1@-239.62,200.92 ; U8.2@38.16,-214.7 U8.2@38.16,-213.78 ; C41.1@325.15,-24.26 326.35,-24.26 C41.1@326.7,-24.61
  Bottom w11.81: R22.2@-530.03,194.82 -514.01,194.82 ; R23.2@-494.6,194.82 -514.01,194.82 ; U6.2@-431.05,176.85 -431.05,157.63 -428.35,154.93 R54.1@-428.35,139.76 -428.57,139.76 -428.57,120.41 ; C47.2@-382.52,139.24 -382.52,126.08 -388.19,120.41 -428.57,120.41 ; U8.2@38.16,-214.7 74.21,-214.7 R56.1@75.14,-213.78 86.95,-213.78 92.52,-219.35 92.52,-271.86 86.8,-277.58 79.95,-277.58 ; R10.2@42.03,10 119.17,10 130.2,-1.03 130.2,-75.11 ; R57.1@72.16,-277.58 79.95,-277.58 ; 80.3,-277.23 79.95,-277.58 ; 138.41,-277.23 140.98,-274.66 U7.2@140.98,-248.35 ; -514.01,194.82 -513.62,194.43 -513.62,140.88 R55.1@-491.97,140.88 -491.97,129.01 -483.37,120.41 -428.57,120.41
  Bottom w15.75: v5(-528.82,-249.34) R28.2@-508.83,-249.34 R29.2@-473.4,-249.34 ; -473.84,-230.28 -473.4,-230.72 ; U2.13@-333.64,-22.22 -333.64,-32.8 C49.1@-254.94,-32.8 -254.94,-13.36 -254.8,-13.21 R46.2@-254.8,4.95 ; R5.1@-276.4,201.77 -276.4,196.19 -262.99,196.19 -246.12,196.19 ; R7.1@-239.62,200.92 -239.62,178.5 -236.93,175.81 ; -131.43,173.06 -123.98,180.51 v1(4.62,180.51) v1(18.12,180.51) ; -131.43,247.32 -74.09,247.32 v1(-54.38,267.03) ; C11.2@-58.7,-74.07 -41.36,-74.07 -39.98,-75.45 v1@-21.14,-75.45 ; 67.38,-72.61 73.95,-79.18 v1@73.95,-96.99 ; v1(73.49,-98.26) 73.49,-97.45 v1@73.95,-96.99 ; v1(73.95,-109.64) v1@73.95,-96.99 ; v1@315.7,280.43 v1(315.57,280.3) v1(324.41,287.56)
  Bottom w17.72: C47.2@-382.52,139.24 -367.28,139.24 -363.58,142.94 -363.58,150.4 -354.32,159.67 R24.2@-306.74,159.67 R25.2@-343.5,159.67 ; v1(-271.78,-85.03) -271.78,-74.11 -236.23,-74.11 -236.19,-74.07 -236.19,-32.8 ; C42.1@326.78,-62.22 326.78,-41.5 326.7,-41.42 326.7,-24.61 326.7,21.17 U3.8@338.96,33.43
  Bottom w19.68: R24.2@-306.74,159.67 -306.33,159.67 -290.18,175.81 ; v1(-279.52,175.18) v1@-278.89,175.81 ; -269.8,196.19 -279.13,186.86 ; v1(-268.47,178.34) -276.99,186.86 -279.13,186.86 ; -262.99,196.19 -270.41,203.61 Q3.1@-270.41,247.35 -187.06,247.35 -178.07,256.34 -178.07,259.93 ; C49.1@-254.94,-32.8 -236.19,-32.8 -184.03,-32.8 -174.83,-23.6 ; -214.04,152.92 -236.93,175.81 v1@-278.89,175.81 ; C12.1@-97.57,-68.33 -85.34,-68.33 ; -84.67,-23.6 -85.34,-24.27 -85.34,-68.33 ; C11.2@-58.7,-74.07 -58.7,-68.33 -85.34,-68.33 ; v1(50.8,-108.4) 50.8,-89.19 ; v1(51.32,-96.87) 51.32,-89.71 50.8,-89.19 ; 67.38,-72.61 50.8,-89.19 ; 92.52,-271.86 97.1,-276.44 142.75,-276.44 166.57,-276.44 175.91,-267.1 175.91,-241.41 190.02,-227.3 190.02,-75.11 ; 130.2,-75.11 151.49,-75.11 190.02,-75.11 ; C42.1@326.78,-62.22 326.78,-75.11 255.07,-75.11 ; -290.18,175.81 -279.13,186.86 ; -290.18,175.81 v1@-278.89,175.81 ; 190.02,-75.11 225.85,-75.11 ; 225.85,-75.11 231.52,-69.44 231.52,-45.44 229.67,-43.59 v6(229.67,-16.88) 252.97,-16.88 255.07,-18.98 255.07,-75.11 ; 225.85,-75.11 255.07,-75.11
  Bottom w39.37: -178.07,259.93 -144.04,259.93 -131.43,247.32 -131.43,173.06 -139.05,165.44 -201.51,165.44 -214.04,152.92 -214.04,-23.6 -174.83,-23.6 -84.67,-23.6 v1@-35.66,-72.61 ; v1@-24.35,-72.61 67.38,-72.61 148.99,-72.61 151.49,-75.11
  other v1: -192.91,265.75 -179.13,265.75 -139.76,265.75 -194.88,275.59 -141.73,277.56 -194.88,285.43 -181.1,285.43 -187.01,293.31
  other v3: 299.21,-218.5
SWDCLK: J7.2 R60.1 U1.K3 | length 745.7
  Top w3.94: v3(91.56,224.44) 91.56,241.61 110.98,261.03 R60.1@110.98,261.44 ; v2(214.86,17.78) 214.86,18.67 211.6,21.92 211.6,122.06 v3(231.36,141.82)
  Inner Layer 2 w2.95: v3(48.23,-48.23) 58.52,-37.94 68.39,-37.94 76.08,-30.25 115.04,-30.25 ; 115.04,-30.25 170.65,-30.25 214.86,13.96 v2(214.86,17.78)
  Inner Layer 3 w2.95: v3(91.56,224.44) 91.56,206.55 93.83,204.28 v4(102.22,204.28)
  Inner Layer 3 w3.94: v3(91.56,224.44) 217.71,224.44 231.36,210.79 v3(231.36,141.82)
  Inner Layer 4 w4.72: v4(102.22,204.28) v1(109.76,217.68)
  Bottom w3.94: v1(109.76,217.68) 172.67,217.68 189.75,234.76 J7.2@189.75,259.26
SWDIO: J7.3 R61.2 U1.J3 | length 673.8
  Top w2.95: R61.2@130.93,224.63 R61.2@131.15,224.63
  Top w3.94: v3(130.93,208.48) 130.93,224.63 R61.2@131.15,224.63 ; v3(227.62,111.6) 227.62,29.54 233.68,23.48 v2(233.68,17.96)
  Inner Layer 2 w2.95: v7(85.18,-40.78) 89.75,-36.21 173.07,-36.21 218.2,8.92 224.64,8.92 v2(233.68,17.96)
  Inner Layer 3 w2.95: v3(34.45,-48.23) 43.81,-38.87 83.27,-38.87 v7(85.18,-40.78) ; v4(129.44,194.18) v3(130.93,208.48) 132.01,209.56 205.13,209.56 215.13,199.56 215.13,124.09 v3(227.62,111.6)
  Inner Layer 4 w4.72: v4(129.44,194.18) v1(144.67,196.45)
  Bottom w4.72: v1(144.67,196.45) 146.62,198.4 178.9,198.4 J7.3@239.75,259.26
SYS_RST: J9.8 Q3.3 | length 146.1
  Top w2.95: v3(-211.38,280.41) -211.32,280.46 J9.8@-210.11,280.46
  Top w7.87: v3(-211.38,280.41) -211.38,291.39 v3(-210.65,292.12)
  Inner Layer 3 w7.87: v3(-211.38,280.41) v3(-210.65,292.12)
  Inner Layer 3 w11.81: v4(-289.78,288.27) -211.38,288.27 v3(-211.38,280.41)
  Inner Layer 4 w11.81: v1(-303.55,292.12) v4(-289.78,288.27)
  Bottom w11.81: v1(-303.55,292.12) -286.16,292.12 Q3.3@-286.16,289.04
TMP: J9.2 R2.1 U1.D3 | length 488.3
  Top w2.95: v3(-264.22,189.06) -263.51,189.77 -256.49,182.74 -256.49,182.49 -244.05,170.05 R2.1@-244.05,169.64
  Top w3.94: R2.1@-244.05,169.64 -226.67,169.64 -223.89,172.42 J9.2@-223.89,210.63
  Inner Layer 3 w2.95: v3(-264.22,189.06) -259.53,184.37 -259.53,75.47 -157.31,-26.75 -118.62,-26.75 -87.79,-57.58 -43.8,-57.58 v3(-34.45,-48.23)
UART2_RX: R55.2 U1.L4 U6.4 | length 971
  Top w2.95: U1.L4@62.01,-34.45 62.32,-34.45 62.32,-48.37 v3(62.63,-48.37)
  Inner Layer 3 w2.95: v4(-433.79,137.93) -431.97,137.93 -422.93,146.97 -368.51,146.97 -336.99,115.45 -336.99,39.07 -243.17,-54.75 -243.17,-84.47 -230.83,-96.81 -199.31,-96.81 -178.43,-117.69 -178.43,-138.76 -157.69,-159.5 45.24,-159.5 91.41,-113.33 91.41,-60.16 79.62,-48.37 v3(62.63,-48.37)
  Inner Layer 4 w2.95: v1(-463.52,140.08) -454.5,149.1 -444.96,149.1 v4(-433.79,137.93)
  Bottom w3.94: v1(-463.52,140.08) -471.73,140.08 -491.55,159.9 R55.2@-491.97,159.9 -488.24,163.63 -464.85,163.63 -460.09,168.39 -460.09,176.85 U6.4@-458.61,176.85
UART2_TX: R54.2 U1.J4 U6.3 | length 967.8
  Inner Layer 3 w2.95: v4(-414.04,134.18) -408.36,139.86 -369.78,139.86 -362.32,132.4 -362.32,132.31 -342.89,112.88 -342.89,36.62 -249.08,-57.2 -249.08,-86.92 -233.14,-102.85 -201.62,-102.85 -184.34,-120.14 -184.34,-141.2 -160.13,-165.41 47.68,-165.41 97.31,-115.78 97.31,-36.75 91.98,-31.42 37.48,-31.42 v3(34.45,-34.45)
  Inner Layer 4 w2.95: v1(-449.56,139.74) -449.56,136.3 -438.88,125.62 -422.6,125.62 v4(-414.04,134.18)
  Bottom w2.95: v1(-449.56,139.74) R54.2@-447.37,139.76
  Bottom w3.94: R54.2@-447.37,139.76 -444.83,142.3 U6.3@-444.83,176.85
UART3_RX: J6.2 U1.E10 | length 388.7
  Top w2.95: J6.2@-38.02,259.85 -36.1,261.77 J6.2@-31.57,261.77
  Top w3.94: J6.2@-38.02,259.85 J6.2@-26.05,258.09 ; J6.2@-31.57,261.77 -31.57,275.56 -19.29,287.84 37.85,287.84 45.98,279.71 v2(45.98,231.86)
  Inner Layer 2 w3.94: v2(-20.67,48.23) -21.44,47.46 -31.5,57.52 -31.5,75.2 -14.24,92.46 -14.24,147.35 45.98,207.57 v2(45.98,231.86)
UART3_TX: J6.1 U1.D9 | length 278.3
  Top w3.94: J6.1@10.29,246.79 J6.1@11.98,259.85 v2(33.14,237.67)
  Inner Layer 2 w3.94: v2(-34.45,34.45) -34.45,50.65 -38.41,54.61 -38.41,79.43 -22.41,95.43 -22.41,148.97 33.14,204.52 v2(33.14,237.67)
VCC_1V8: C5.2 J9.5 U1.B11 | length 245.3
  Top w3.94: C5.2@-184.37,169.73 C5.2@-183.96,169.32 ; v2(-62.01,62.01) U1.B11@-61.93,61.93
  Top w9.84: C5.2@-184.37,169.73 -183.5,169.73 -172.96,159.19 -172.96,128.53 -159.89,115.46 -100.72,115.46 v2(-80.22,94.96)
  Top w11.81: C5.2@-184.37,169.73 -182.13,171.97 -182.13,190.66 -182.55,191.08 J9.5@-182.55,210.63
  Inner Layer 2 w7.87: v2(-80.22,94.96) -64.78,94.96 -62.01,92.19 v2(-62.01,62.01)
VCC_3V3: C28.1 C29.1 C32.1 C33.1 C34.1 C48.2 D2.1 FPC1.3 FPC1.17 J1.1 J3.8 J9.13 J9.14 J9.16 R13.2 R47.2 R48.1 R49.1 R50.1 R51.1 R52.1 R53.1 R58.2 R59.2 U5.7 U5.8 | length 3750.7
  Top w2.95: v6(-519.2,53.4) -519.2,82.06 J1.1@-510.66,82.06 ; -181.79,-276.09 -181.39,-276.49 v6(-181.39,-294.71) ; -166.13,-276.09 -162.99,-279.23 v6(-162.99,-294.71) ; J9.13@-153.61,208.96 -133.71,208.96 -130.78,211.89 J9.16@-130.78,245.39 ; J9.14@-153.61,282.14 -137.37,282.14 -134.39,285.13 ; v6(-144.01,-295.51) -131.48,-295.51 -129.28,-293.31 -129.28,-276.09 ; -134.39,285.13 -134.39,286.11 -131.4,289.1 v6(-121.07,289.1) -121.07,283.98 -130.78,274.27 J9.16@-130.78,245.39 ; -134.39,285.13 -130.43,289.09 v6(-103.22,289.09) v6(-103.59,271.75) -120.66,271.75 -130.78,261.63 J9.16@-130.78,245.39
  Top w3.94: J9.13@-153.61,208.96 -153.61,247.48 ; J9.14@-153.61,282.14 -153.61,247.48 ; J9.16@-130.78,245.39 -132.87,247.48 -153.61,247.48
  Top w11.81: 37.81,-205.57 42.81,-200.57 FPC1.3@42.81,-174.01
  Top w12.99: -234.71,-239.29 -232.79,-237.37 FPC1.17@-232.79,-174.01
  Top w19.68: J3.8@-415.89,-280.8 -415.89,-263.64 -389.06,-236.81 -347.9,-236.81 ; -221.07,-236.81 -181.79,-276.09 -166.13,-276.09 -129.28,-276.09 21.52,-276.09 36.49,-261.12 36.49,-206.89 37.81,-205.57
  Top w31.5: J1.1@-510.66,82.06 -437.07,82.06 D2.1@-420.41,65.39 -386.54,65.39 -347.9,26.75 -347.9,-236.81 -221.07,-236.81 -168.56,-236.81 -129.28,-276.09
  Inner Layer 5 w2.95: v5@-374.12,283.6 -374.12,290.43 v5(-373.47,291.08)
  Inner Layer 5 w39.37: v6(-519.2,53.4) -519.2,154.15 -537.83,172.78 -537.83,226.39 -480.62,283.6 -374.12,283.6 -349.66,283.6 -304.25,238.19 -128.35,238.19 -103.59,262.95 v6(-103.59,271.75)
  Bottom w2.95: v6(-162.99,-294.71) -152.95,-275.92 C28.1@-143.76,-275.92 -144.01,-275.92 v6(-144.01,-295.51)
  Bottom w3.94: R48.1@-448.88,270.3 -446.45,270.3 R48.1@-446.45,271.2 ; R47.2@-411.84,270.1 -411.84,270.42 R47.2@-411.06,271.2 ; C33.1@17.05,-155.59 17.37,-155.27 C33.1@20.59,-155.27 ; C32.1@54.78,-154.91 C32.1@55.19,-155.27 ; R51.1@87.66,-155.27 87.66,-154.81 R51.1@92.15,-154.81 ; R50.1@127.58,-154.81 128.77,-154.81 R50.1@129.23,-155.27
  Bottom w11.81: C29.1@-239.79,-275.41 -239.79,-257.45 -239.24,-256.9 U5.8@-239.24,-235 ; -221.79,-275.41 -219.55,-273.17 U5.7@-219.55,-235
  Bottom w15.75: R49.1@-486.28,270.3 -485.87,270.3 R49.1@-484.97,271.2 ; R48.1@-446.45,271.2 R49.1@-484.97,271.2 ; R47.2@-411.84,270.1 v5(-411.84,289.6) ; R47.2@-411.06,271.2 R49.1@-484.97,271.2 ; v5(-373.47,291.08) C48.2@-373.47,268.73 -373.47,269.6 -375.07,271.2 R49.1@-484.97,271.2 ; C29.1@-239.79,-275.41 -221.79,-275.41 -196.18,-275.41 -195.67,-275.92 ; R53.1@-53.58,-272.32 R52.1@-53.58,-234.92 -53.58,-224.02 ; R59.2@-53.41,-197.3 -53.58,-197.46 -53.58,-204.83 ; C33.1@20.59,-155.27 C34.1@-19.71,-155.27 ; C32.1@55.19,-155.27 C34.1@-19.71,-155.27 ; R51.1@87.66,-155.27 C34.1@-19.71,-155.27 ; R50.1@129.23,-155.27 C34.1@-19.71,-155.27 ; R58.2@165.25,-155.27 C34.1@-19.71,-155.27 ; -195.67,-275.92 -172.51,-275.92 ; -195.67,-275.92 -195.67,-282.43 -183.39,-294.71 v6(-181.39,-294.71) -181.39,-284.8 -172.51,-275.92 ; -172.51,-275.92 C28.1@-143.76,-275.92 -141.2,-275.92 -141.2,-257.11 -135.26,-251.17 -108.35,-251.17 -105.63,-248.46 R13.2@-105.63,-226.95 -56.51,-226.95 -53.58,-224.02 ; -53.58,-224.02 -53.58,-204.83 ; -53.58,-204.83 -53.58,-168.5 -40.45,-155.37 C34.1@-20.69,-155.37 -20.69,-156.24 C34.1@-19.71,-155.27
  other v5: -413.39,269.69 -399.61,269.69 -387.8,269.69 -374.02,269.69 -411.42,279.53 -399.61,281.5 -387.8,281.5 -374.02,281.5 -401.57,291.34 -389.76,291.34
  other v6: -539.37,33.46 -519.69,33.46 -503.94,41.34 -537.4,53.15
VDD5V_EN: J9.3 U1.C5 | length 397.9
  Top w3.94: v3(-210.4,193.72) -210.4,210.63 J9.3@-210.11,210.63
  Inner Layer 3 w2.95: v3(-210.4,193.72) -210.4,168.49 -177.59,135.68 -137.23,135.68 -110.75,109.2 -72.58,109.2 0.38,36.24 0.38,34.83 ; v3(-48.23,-20.67) -26.65,-20.67 0.49,6.48 0.49,34.5 0.43,34.56 0.43,34.74 0.39,34.78
VDDF: C9.2 C12.2 U1.C2 | length 143.1
  Inner Layer 2 w7.87: v7(-69.62,-77.99) -61.29,-77.99 -46.77,-63.47 v2(-48.23,-62.01)
  Inner Layer 3 w11.81: v4(-88.43,-77.99) v7(-69.62,-77.99)
  Inner Layer 4 w11.81: v1(-135.8,-75.22) -91.2,-75.22 v4(-88.43,-77.99)
  Bottom w2.95: v1(-135.8,-75.22) C9.2@-135.47,-75.22
  Bottom w11.81: C9.2@-135.47,-75.22 -135.47,-76.09 -121.63,-89.93 C12.2@-97.57,-89.93
VEM_INT: J3.1 R27.2 U1.C7 | length 750.3
  Top w2.95: v3(-48.23,6.89) U1.C7@-48.01,6.67
  Top w3.94: v3(-48.23,6.89) U1.C7@-47.96,6.89
  Top w15.75: J3.1@-455.26,-192.77 v6(-455.26,-151.92)
  Inner Layer 3 w7.87: v4(-147.47,7.92) -139.92,0.37 -58.94,0.37 -56.44,2.87 -48.71,7.67 v3(-48.23,6.89)
  Inner Layer 3 w15.75: v6(-455.26,-151.92) -440.29,-136.95 -318.22,-136.95 v6(-306.75,-148.42)
  Inner Layer 4 w15.75: v4(-147.47,7.92) -135.17,7.92 v8@-130.54,3.29 ; v8(-133.82,3.29) v8@-130.54,3.29 ; v8(-122.28,2.69) -122.54,2.95 -130.2,2.95 v8@-130.54,3.29
  Inner Layer 5 w15.75: v6(-306.75,-148.42) -306.53,-148.2 -306.53,-51.43 -252.41,2.69 v8(-122.28,2.69)
  Bottom w11.81: R27.2@-492.86,-211.26 -503.07,-201.05 -503.07,-163.92 -487.21,-148.06 -455.26,-148.06 v6(-455.26,-151.92)
pads on no net: J2.0_1 J2.0_2 J2.0_3 J3.0_1 J3.0_2 J3.0_3 U1.A10 U1.A11 U1.A12 U1.B10 U1.C9 U1.C10 U1.C11 U1.D1 U1.D7 U1.D10 U1.D11 U1.E2 U1.E3 U1.E4 U1.E6 U1.F4 U1.F9 U1.F10 U1.G3 U1.G4 U1.G9 U1.G10 U1.H10 U1.J7 U1.J8 U1.J10 U1.J12 U1.K1 U1.K4 U1.K7 U1.K8 U1.K12 U1.L7 U1.L8 U1.L12 U1.M4 U1.M5 U1.M6 U1.M7 U1.M8 U1.M12 U2.1 U2.4 U2.12 U5.5 U5.6 U5.12 U5.13

## Polygon pours and split planes (outlines as drawn)
GND on Inner Layer 3 "Inner Layer 3-GND" (solid, remove dead copper, pour order 0): -1057.09,956.69 986.22,956.69 986.22,-925.2 -1057.09,-925.2
GND on Inner Layer 5 "Inner Layer 5-GND" (solid, remove dead copper, pour order 1): -887.8,828.74 816.93,828.74 816.93,-785.43 -887.8,-785.43
GND on Top "Top-GND" (solid, remove dead copper, pour order 2): -1248.03,1090.55 1141.73,1090.55 1141.73,-1019.69 -1248.03,-1019.69
GND on Bottom "Bottom-GND" (solid, remove dead copper, pour order 3): -795.28,744.09 740.16,744.09 740.16,-720.47 -795.28,-720.47
GND on Inner Layer 4 "Inner Layer 4-GND" (solid, remove dead copper, pour order 4): -980.32,901.57 901.57,901.57 901.57,-836.61 -980.32,-836.61
GND on Inner Layer 2 "Inner Layer 2-GND" (solid, remove dead copper, pour order 5): -1127.95,1019.69 1068.9,1019.69 1068.9,-970.47 -1127.95,-970.47

## Keep-outs
Top:
  region: -98.77,97.34 96.97,97.34 96.97,-96.84 -98.77,-96.84 -98.77,97.34
  region: -291.34,35.43 -232.28,35.43 -232.28,-64.96 -291.34,-64.96 -291.34,35.43
  region: -114.17,206.69 -23.62,206.69 -23.62,133.86 -114.17,133.86 -114.17,206.69
  region: 68.9,-53.15 167.32,-53.15 172.24,-58.07 172.24,-80.71 244.09,-80.71 244.09,-9.84 253.94,0 305.12,0 305.12,41.34 297.24,41.34 297.24,122.05 368.11,122.05 368.11,41.34 372.05,41.34 372.05,-37.4 332.68,-37.4 332.68,-27.56 271.65,-27.56 271.65,-104.33 145.67,-104.33 145.67,-82.68 92.52,-82.68 80.71,-70.87 68.9,-70.87 68.9,-53.15
Bottom:
  region: -429.13,-96.46 -328.74,-96.46 -328.74,-155.51 -429.13,-155.51 -429.13,-96.46
Keep-Out Layer:
  lines w3.94: -563.58,-130.41 ccw(c-565.73,-142.02) -577.55,-142.02 -577.55,-276.6 ccw(c-538.18,-276.6) -538.18,-315.97 343.71,-315.97 ccw(c343.71,-276.6) 383.08,-276.6 383.08,-148.84 ccw(c363.4,-148.84) 377.72,-135.34 ; -563.6,-130.4 ccw(c-557.86,-99.44) -553.59,-68.23 -565.47,-68.51 cw(c-565.74,-56.7) -577.55,-56.7 -577.55,255.78 cw(c-565.73,255.78) -563.12,267.3 -563.1,267.29 ccw(c-557.86,290.33) -535.6,298.21 -535.59,298.2 cw(c-524.46,302.14) -524.46,313.95 394.89,313.95 cw(c394.89,302.14) 406.7,302.14 406.7,277.8 cw(c394.89,277.8) 392.74,266.18 ; -563.6,-130.4 -563.58,-130.41 ; 377.7,-135.32 cw(c394.89,-119.12) 387.05,-96.84 387.02,-96.85 ccw(c383.08,-85.71) 394.89,-85.71 394.89,192.2 ccw(c383.08,192.2) 382.79,204 382.74,204.01 cw(c387.02,235.21) 392.76,266.18 ; 377.7,-135.32 377.72,-135.34 ; 392.74,266.18 392.76,266.18

## Other copper
Top:
  region net SW1_VDD1V8: -354.33,285.43 -316.93,285.43 -316.93,204.72 -354.33,204.72 -354.33,285.43
  region net VCC_3V3: -425.2,-275.59 -425.2,-218.5 -358.27,-218.5 -345.47,-205.71 -232.28,-205.71 -232.28,-214.57 -163.39,-214.57 -123.03,-254.92 -123.03,-287.4 -138.29,-302.66 -179.13,-302.66 -230.07,-251.72 -389.76,-251.72 -404.65,-266.61 -404.65,-283.46 -429.13,-283.46 -429.13,-275.59 -425.2,-275.59
  region net NETD2_2: -547.24,169.29 -366.14,169.29 -366.14,118.11 -547.24,118.11 -547.24,169.29
  region net SW2_VDD1V9: -202.76,297.24 -175.2,297.24 -175.2,257.87 -202.76,257.87 -202.76,297.24
  region net VCC_3V3: -551.18,98.43 -362.2,98.43 -349.41,85.63 -349.41,17.72 -370.08,17.72 -390.75,38.39 -448.82,38.39 -469,18.21 -551.18,18.21 -551.18,98.43
  region net VCC_3V3: -169.29,204.72 -169.29,297.24 -94.49,297.24 -94.49,261.81 -125.98,261.81 -125.98,204.72 -169.29,204.72
Inner Layer 3:
  region net SW2_VDD1V9: -198.82,297.24 -143.7,297.24 -143.7,261.81 -198.82,261.81 -198.82,297.24
  region net SW2_VDD1V9: 253.94,-208.66 316.93,-208.66 316.93,-226.38 253.94,-226.38 253.94,-208.66
  region net SW1_VDD1V8: -352.36,259.84 -316.93,259.84 -316.93,226.38 -352.36,226.38 -352.36,259.84
Inner Layer 4:
  region net SW2_VDD1V9: -198.82,299.21 -135.83,299.21 -135.83,261.81 -198.82,261.81 -198.82,299.21
Inner Layer 5:
  region net VCC_3V3: -419.29,301.18 -366.14,301.18 -366.14,263.78 -419.29,263.78 -419.29,301.18
  region net VCC_3V3: -547.24,74.8 -496.06,74.8 -496.06,15.75 -547.24,15.75 -547.24,74.8
  region net VCC_3V3: -131.89,295.28 -88.58,295.28 -88.58,259.84 -105.32,243.11 -131.89,243.11 -131.89,295.28